# Altium PCB Spinn5Power.PcbDoc
Units mil, origin at the board's own origin, x right, y up, seen from the top; angles counter-clockwise.
Board outline 905.51 x 1968.5 mil, 2 copper layers (Top Layer, Bottom Layer), stack 60.8 mil thick; 9 components, 6 nets, 49 pads, 0 vias.
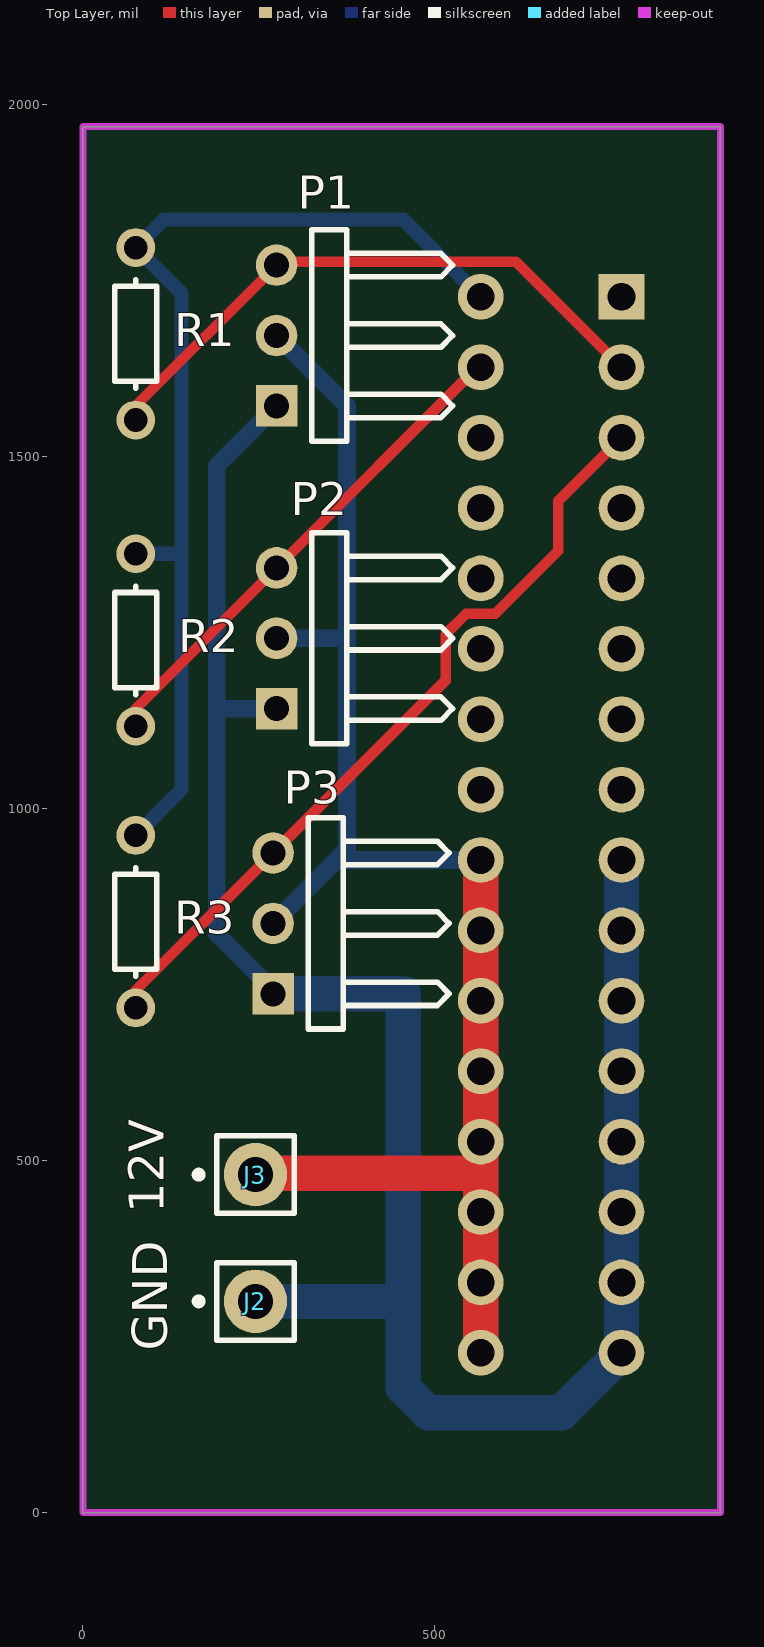
[diagram p0: Top Layer view]
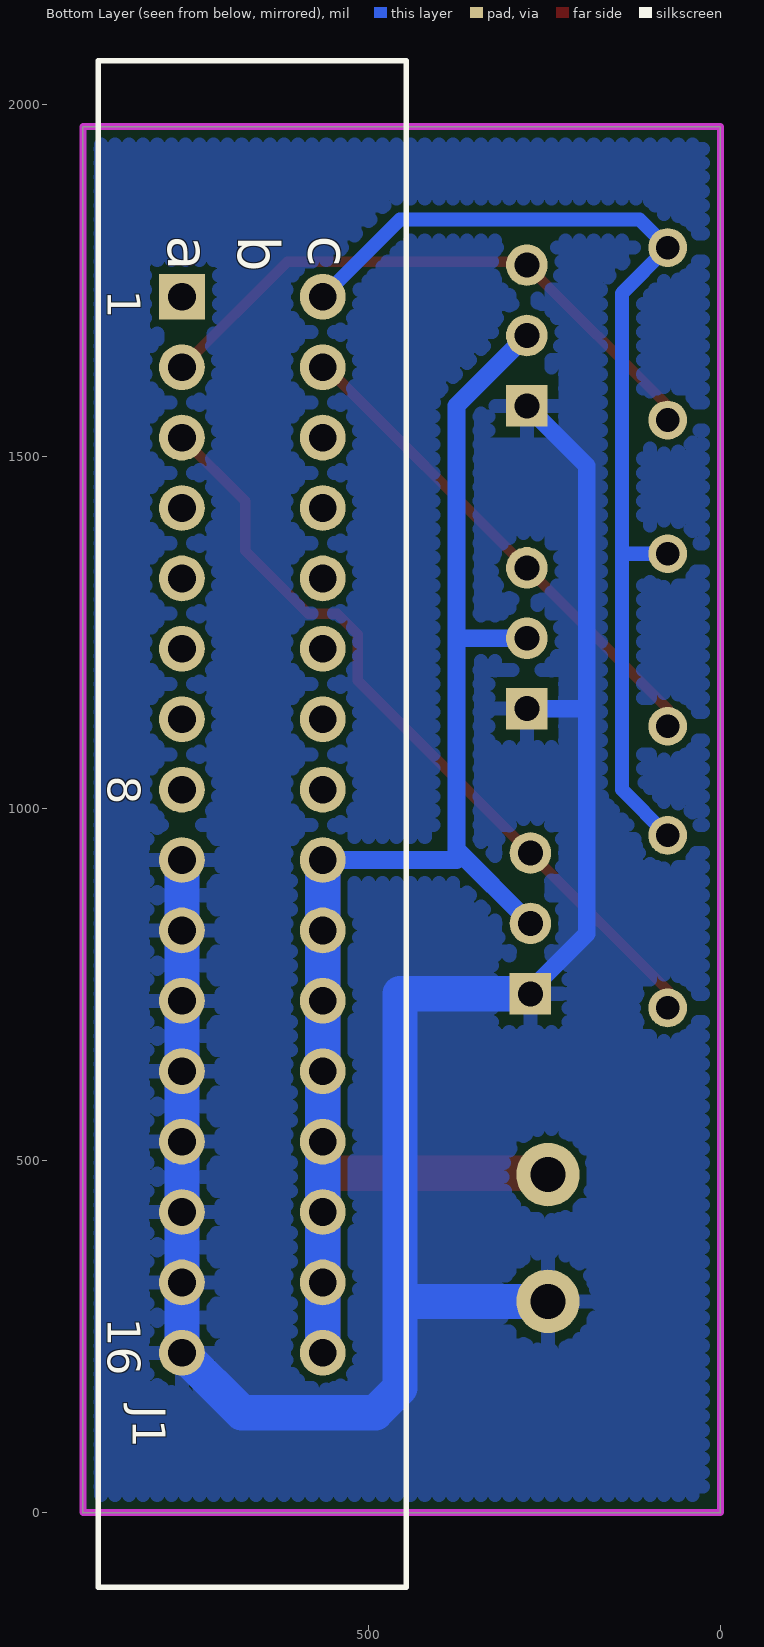
[diagram p1: Bottom Layer view, seen from below]
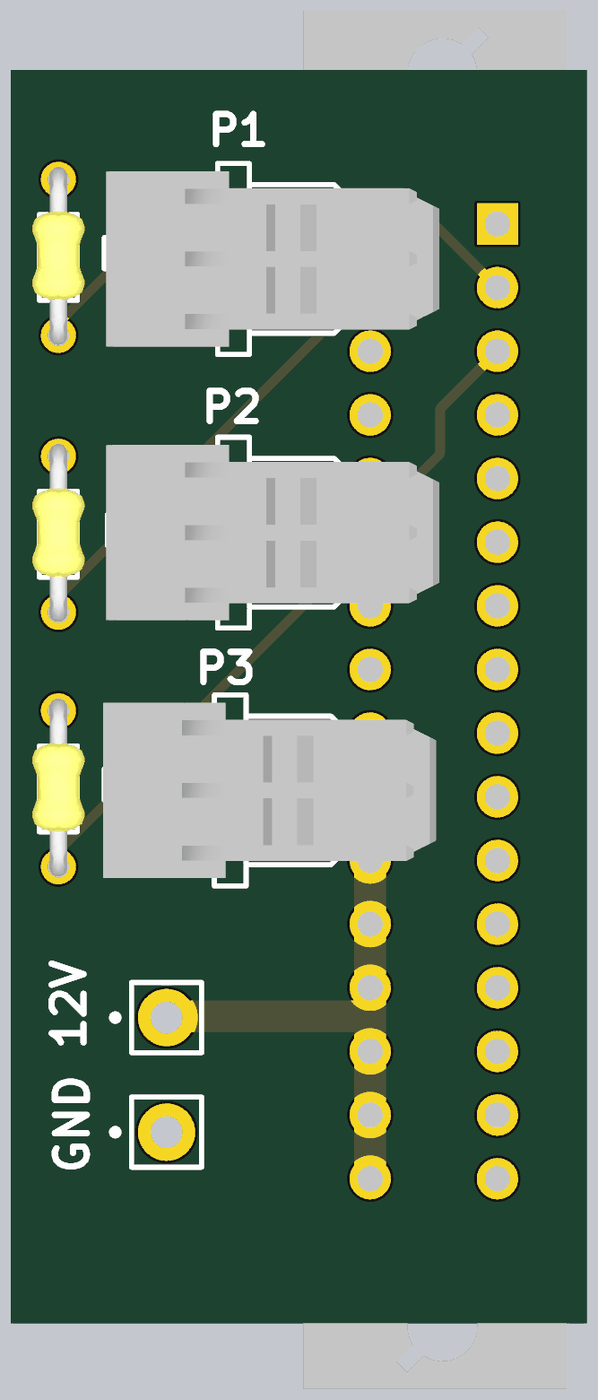
[diagram p2: 3D render of the assembled board from above, using the file's embedded part models]

## Layer stack, top to bottom
Top Solder: solder mask 0.4, Solder Resist, Dk 3.5
Top Layer: signal copper 1.4
Dielectric 1: dielectric 58, FR-4, Dk 4.8
Bottom Layer: signal copper 1.4
Bottom Solder: solder mask 0.4, Solder Resist, Dk 3.5

## Board outline
0,0 0,1968.5 905.51,1968.5 905.51,0

## Design rules (kind name [scope] priority, off if disabled: settings)
Clearance [All] p1: gap=10
PolygonConnect [All] p1: connectstyle=Relief reliefconductorwidth=20 reliefentries=4 polygonreliefangle="90 Angle" airgapwidth=15
RoutingVias [All] p1: holewidth=28 width=50 viastyle="Through Hole" minholewidth=28 minwidth=50 maxholewidth=28 maxwidth=50
SolderMaskExpansion [All] p1: expansion=4
Width [All] p1: maxlimit=50 minlimit=10 preferedwidth=10 minimp=50.000000 maximp=50.000000 favimp=50.000000
30 further rules are at their usual default settings.

## Classes and differential pairs
component class Spinn5Power: J2 J3 P1 P2 P3 R1 R2 R3

## Components (designator, comment, footprint, x,y, rotation, side; value= is the part's Value field where it differs from the comment)
J1 "09 23 248 6824" 0923248X824 665,976.89 r270 bottom
J2 "Socket" PIN1 245,300 r90 top
J3 "Socket" PIN1 245,480 r90 top
P1 "Header 3H" HDR1X3H 275,1571.89 r90 top
P2 "Header 3H" HDR1X3H 275,1141.89 r90 top
P3 "Header 3H" HDR1X3H 270,736.89 r90 top
R1 "Res1" AXIAL-0.3 75,1641.89 r90 top
R2 "Res1" AXIAL-0.3 75,1206.89 r90 top
R3 "Res1" AXIAL-0.3 75,806.89 r90 top

## Footprints (in the part's own frame and the unit in brackets; to place one, negate y for a bottom-side part, rotate by r counter-clockwise, add the part's x,y. Pads: shape width x height; smd on the part's side, far side on the other; paste and mask are expansions set on the pad)
0923248X824 [mm] "Connector; DIN 41612, Type 2C, Thru-Hole; Rows a+b+c, 48 Position; Vertical"
  rect 1.65x1.65 hole 1: A1(-19.05,-2.54)
  round 1.65 hole 1: A2(-16.51,-2.54) A3(-13.97,-2.54) A4(-11.43,-2.54) A5(-8.89,-2.54) A6(-6.35,-2.54) A7(-3.81,-2.54) A8(-1.27,-2.54) A9(1.27,-2.54) A10(3.81,-2.54) A11(6.35,-2.54) A12(8.89,-2.54) A13(11.43,-2.54) A14(13.97,-2.54) A15(16.51,-2.54) A16(19.05,-2.54) C1(-19.05,2.54) C2(-16.51,2.54) C3(-13.97,2.54) C4(-11.43,2.54) C5(-8.89,2.54) C6(-6.35,2.54) C7(-3.81,2.54) C8(-1.27,2.54) C9(1.27,2.54) C10(3.81,2.54) C11(6.35,2.54) C12(8.89,2.54) C13(11.43,2.54) C14(13.97,2.54) C15(16.51,2.54) C16(19.05,2.54)
  silkscreen extent -27.56,-5.55 27.5,5.55, body extent -27.56,-5.29 27.44,5.21, height 11.59
AXIAL-0.3 [mm] "Axial Device, Thru-Hole; 2 Leads; 0.3 in Pin Spacing"
  round 1.4 hole 0.85: 1(-2.286,0) 2(3.937,0)
  silkscreen extent -1.14,-0.76 2.77,0.76, body extent -2.66,-1.05 4.44,1.05, height 1.75
HDR1X3H [mm] "Connector; Header; 3 Position; Right Angle"
  rect 1.5x1.5 hole 0.9: 1(0,0)
  round 1.5 hole 0.9: 2(2.54,0) 3(5.08,0)
  silkscreen extent -1.27,-6.35 6.35,-1.27, body extent -0.96,-10.13 6.04,3.18, height 6.33
PIN1 [mil] "Connector; Plug"
  round 90 hole 50: 1(0,0)
  silkscreen extent -55,-55 55,86

## Part data
J1: "Eurocard DIN 41612, Type 2C, Half Size, 48 Position, Rows a+b+c, Performance level 2, Female, Lead 2.9 mm, Pitch 2.54 mm"
P1 P2 P3: "Header, 3-Pin, Right Angle"
R1 R2 R3: "Resistor"

## Nets (pads, with @x,y where several pads share a name; then routed paths per layer and width w, separated by ;. In a path a pad name is that pad's centre, name@x,y a point inside that pad or via, vN(x,y) a via of type N, cw(c..) or ccw(c..) an arc to the next point about the centre after c; other vN are vias at no path point)
+3V: J1.C1 R1.2 R2.2 R3.2 | length 1501
  Bottom Layer w20: R3.2 140,1026.89 140,1361.89 ; R2.2@80,1361.89 140,1361.89 ; J1.C1 455,1836.89 115,1836.89 R1.2 140,1731.89 140,1361.89
+12V: J1.C9 J1.C10 J1.C11 J1.C12 J1.C13 J1.C14 J1.C15 J1.C16 J3.1 P1.2 P2.2 P3.2 | length 2947
  Top Layer w50: J3.1@245,481.89 565,481.89 ; J1.C16 J1.C15 J1.C14 565,481.89 ; J1.C9 J1.C10 J1.C11 J1.C12 J1.C13 565,481.89
  Bottom Layer w25: P3.2 375,941.89 ; P2.2 370,1241.89 375,1246.89 ; P1.2 375,1571.89 375,1246.89 ; J1.C9 375,926.89 375,941.89 ; 375,941.89 375,1246.89
  Bottom Layer w50: J1.C16 J1.C15 J1.C14 J1.C13 J1.C12 J1.C11 J1.C10 J1.C9
GND: J1.A9 J1.A10 J1.A11 J1.A12 J1.A13 J1.A14 J1.A15 J1.A16 J2.1 P1.1 P2.1 P3.1 | length 3000.1
  Bottom Layer w25: P3.1@275,736.89 190,821.89 190,1141.89 ; P2.1 190,1141.89 ; P1.1 190,1486.89 190,1141.89
  Bottom Layer w50: J2.1 455,300 ; P3.1@275,736.89 455,736.89 455,300 ; J1.A9 J1.A10 J1.A11 J1.A12 J1.A13 J1.A14 J1.A15 J1.A16 680,141.89 490,141.89 455,176.89 455,300
SENSE1: J1.A2 P1.3 R1.1 | length 859.9
  Top Layer w15: R1.1 75,1571.89 P1.3 ; P1.3@275,1776.87 615.02,1776.87 J1.A2
  Bottom Layer w15: P1.3 P1.3@275,1776.87
SENSE2: J1.C2 P2.3 R2.1 | length 714.4
  Top Layer w15: R2.1 75,1141.89 P2.3 J1.C2@562.5,1629.39
SENSE3: J1.A3 P3.3 R3.1 | length 1130
  Top Layer w15: R3.1 75,741.89 P3.3@265,931.89 ; P3.3@275,931.89 P3.3@265,931.89 ; J1.A3 675,1436.89 675,1366.21 585.66,1276.87 544.3,1276.87 515.02,1247.59 515.02,1181.91 P3.3 P3.3@265,931.89
pads on no net: J1.A1 J1.A4 J1.A5 J1.A6 J1.A7 J1.A8 J1.C3 J1.C4 J1.C5 J1.C6 J1.C7 J1.C8

## Polygon pours and split planes (outlines as drawn)
GND on Bottom Layer "GND pour" (hatched 90Degree grid 20 track 20, pour order 43): 5,5 900,5 900,1960 5,1960

## Keep-outs
Keep-Out Layer:
  lines w10: 0,0 0,1968.5 ; 0,0 905,0 0,0 ; 0,0 0,1968.5 ; 0,1968.5 905.51,1968.5 ; 0,1968.5 905.51,1968.5 ; 905.51,1968.5 905.51,0 905.51,1968.5

## Silkscreen, mask and mechanical layers (free items; w line width, h text height)
Top Overlay:
  text "12V" at 115,425 h50 r90
  text "GND" at 120,230 h50 r90
Mechanical 1:
  the board outline again, w10

## Text inside footprints (layer, text, board x,y; h text height)
J1: Bottom Overlay "16" at 870,276.89 h47.24 r90; Bottom Overlay "8" at 870,1046.89 h47.24 r90; Bottom Overlay "c" at 584.68,1813.9 h59.06 r90; Bottom Overlay "b" at 684.68,1813.9 h59.06 r90; Bottom Overlay "a" at 784.68,1813.9 h59.06 r90; Bottom Overlay "1" at 870,1736.89 h47.24 r90